# EAGLE board msop converter (EAGLE 9.5.2)
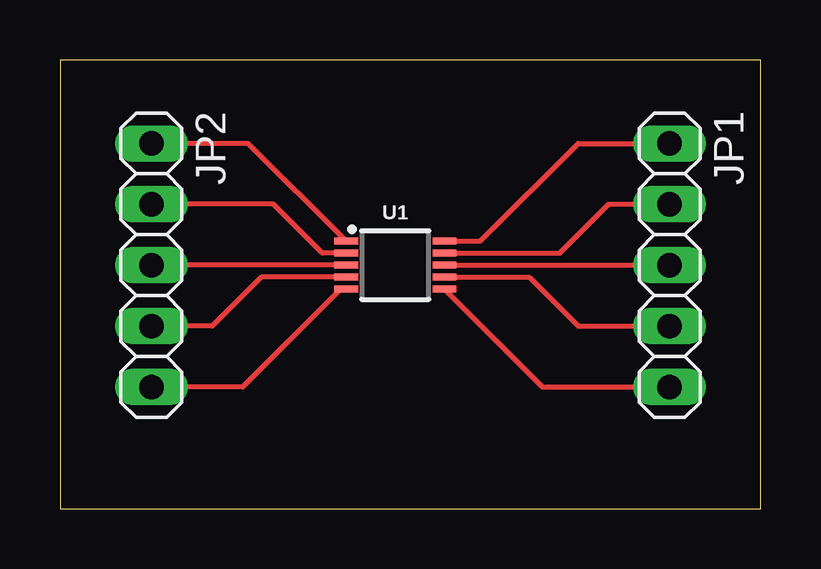
[diagram p0: board, top side]

Size 29.19 x 18.72 mm. Coordinates in mm from the lower left corner, seen from the top.
Outline: 0,0 29.19,0 29.19,18.72 0,18.72 0,0
Copper layers (1*16): Top 0.035mm / dielectric 1.5mm / Bottom 0.035mm
Design rules "default": minimum track width 6mil, minimum drill 0.35mm, track to track 6mil, track to pad 6mil, pad to pad 6mil, via to via 6mil, smd to smd 6mil, copper to edge 40mil, drill to drill 6mil, minimum pad ring 10mil, minimum via ring 8mil, stop-mask expansion 4mil, vias tented up to drill 0mil, thermal gap 10mil

## Footprints (pad centres in the part's own frame; a part is rotated, then mirrored left to right if it is on the bottom)
1X05 = drill 1.016 long: 1 -5.08,0; 2 -2.54,0; 3 0,0; 4 2.54,0; 5 5.08,0
MSOP10 = smd 0.25 x 1: 1 -1,-2.05; 2 -0.5,-2.05; 3 0,-2.05; 4 0.5,-2.05; 5 1,-2.05; 6 1,2.05; 7 0.5,2.05; 8 0,2.05; 9 -0.5,2.05; 10 -1,2.05

## Placement (x,y rotation side)
JP1  [1X05]  25.4,10.16 270 top
JP2  [1X05]  3.81,10.16 270 top
U1  ADS1015  [MSOP10]  13.97,10.16 270 top

## Library data of the parts
JP1 JP2 = pinhead
U1 = SparkFun-IC-Conversion; PROD_ID: IC-12270

## Nets
N$1: JP2.1 U1.1
N$2: JP2.2 U1.2
N$3: JP2.3 U1.3
N$4: JP2.4 U1.4
N$5: JP2.5 U1.5
N$6: JP1.1 U1.10
N$7: JP1.2 U1.9
N$8: JP1.3 U1.8
N$9: JP1.4 U1.7
N$10: JP1.5 U1.6

## Tracks (layer width: path | path; a pad name or v marks a point on that pad's centre or on a via)
N$1
  Top 0.2: U1.1 7.84,15.24 JP2.1
N$2
  Top 0.2: U1.2 10.93,10.66 8.89,12.7 JP2.2
N$3
  Top 0.2: U1.3 JP2.3
N$4
  Top 0.2: U1.4 8.39,9.66 6.35,7.62 JP2.4
N$5
  Top 0.2: U1.5 11.7,9.16 7.62,5.08 JP2.5
N$6
  Top 0.2: U1.10 17.51,11.16 21.59,15.24 JP1.1
N$7
  Top 0.2: U1.9 20.82,10.66 22.86,12.7 JP1.2
N$8
  Top 0.2: U1.8 JP1.3
N$9
  Top 0.2: U1.7 19.55,9.66 21.59,7.62 JP1.4
N$10
  Top 0.2: U1.6 20.1,5.08 JP1.5